# Altium PCB PCB1.PcbDoc (part 1 of 2)
Units mil, origin at the board's own origin, x right, y up, seen from the top; angles counter-clockwise.
Board outline 4330 x 2220 mil, 2 copper layers (Top Layer, Bottom Layer); 72 components, 51 nets, 254 pads, 65 vias.
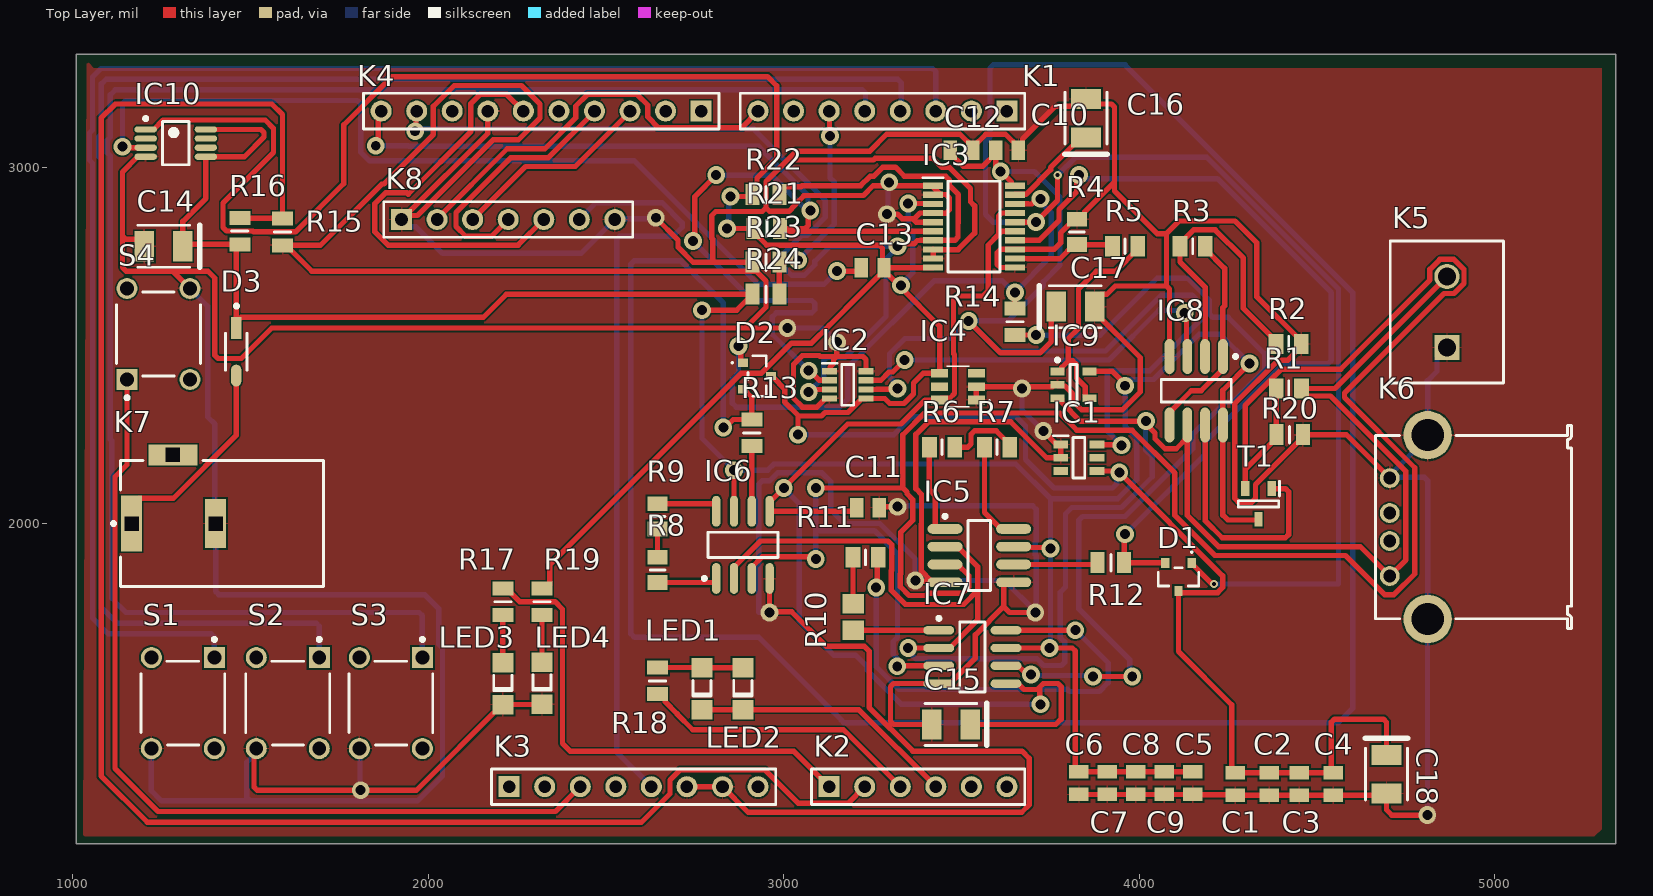
[diagram p0: Top Layer view]
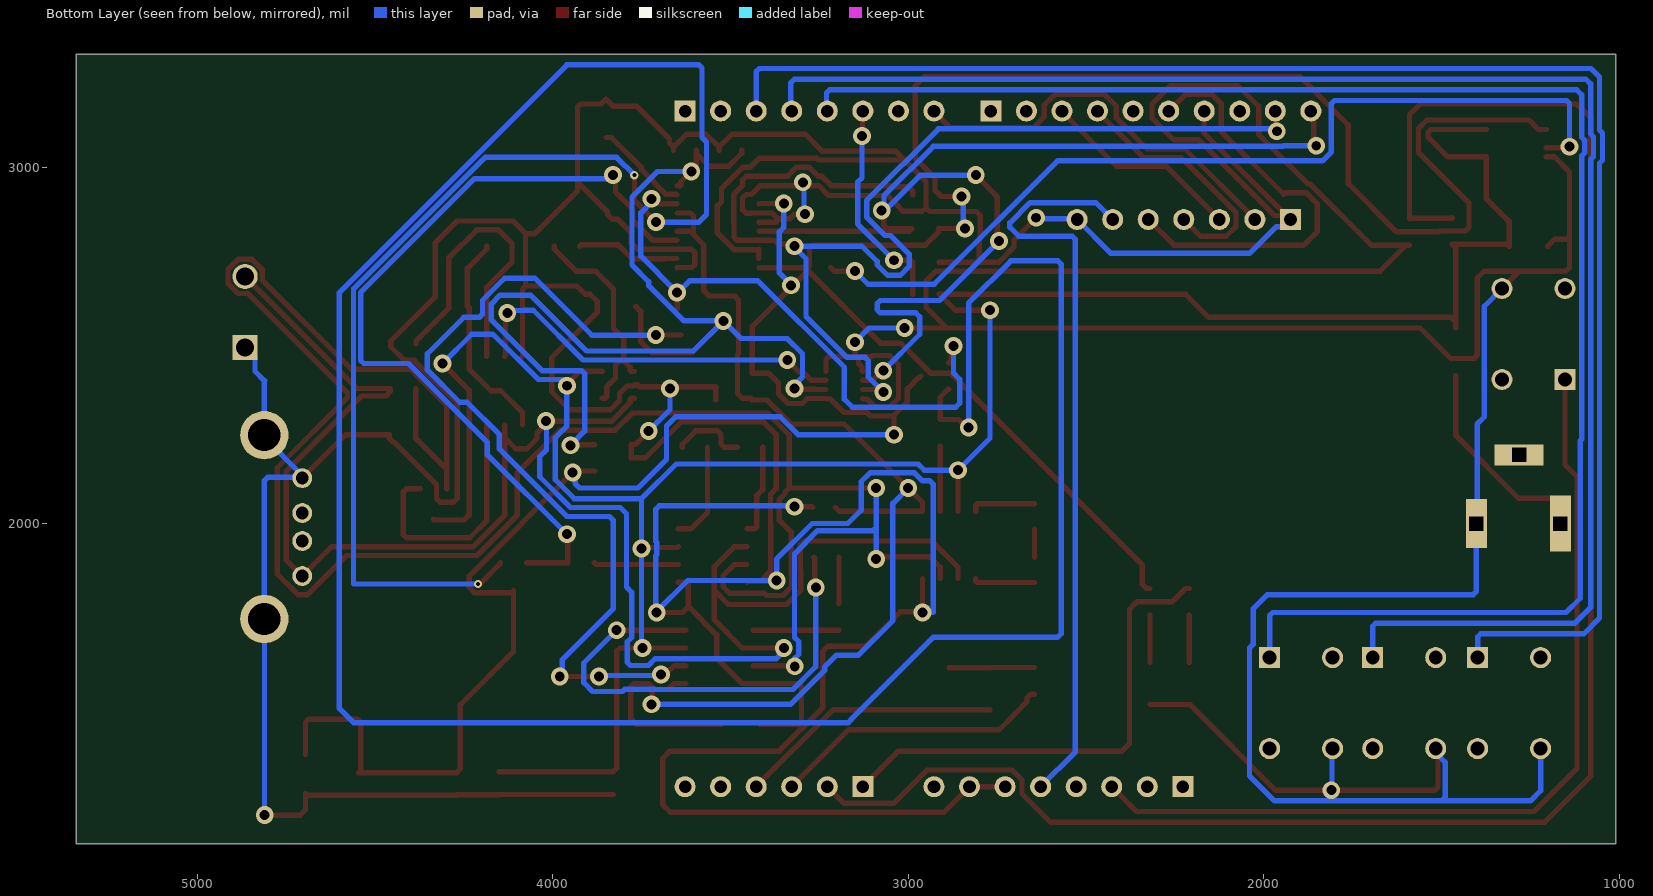
[diagram p1: Bottom Layer view, seen from below]
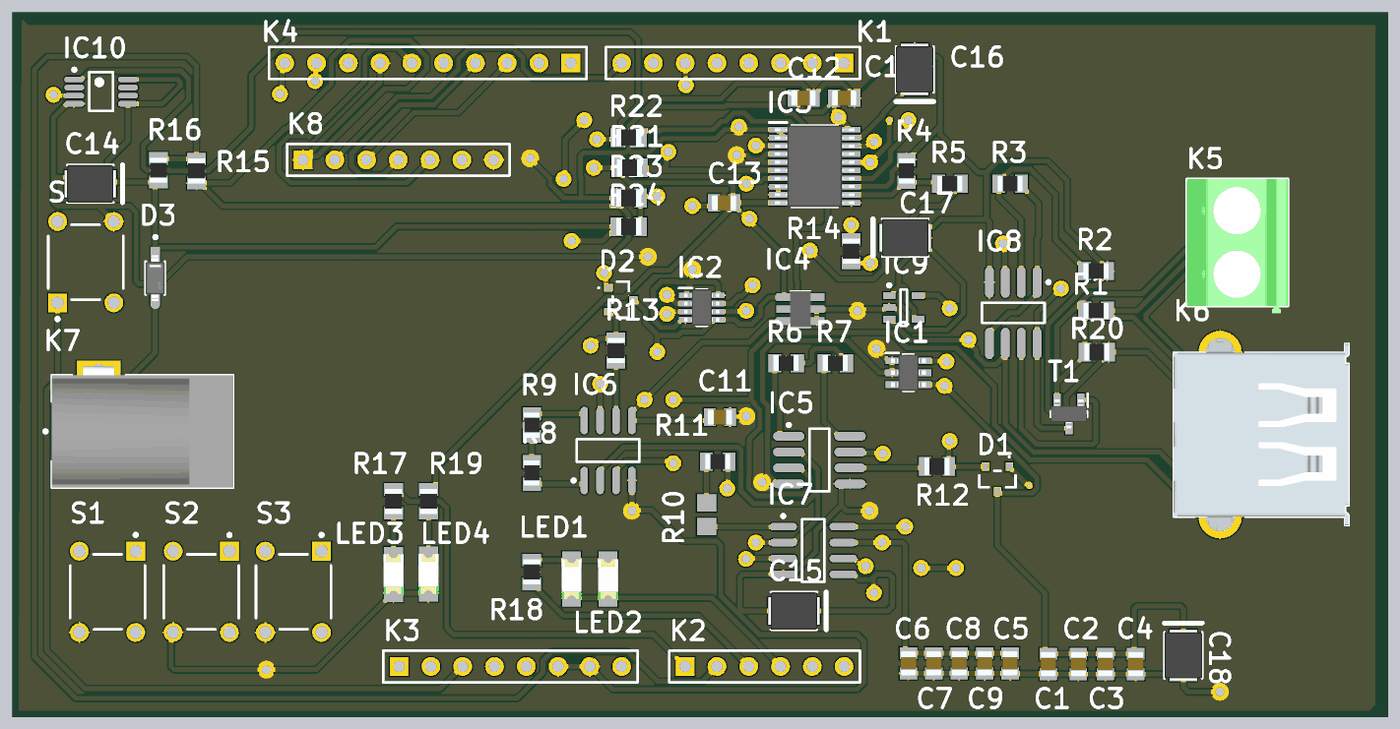
[diagram p2: 3D render of the assembled board from above, using the file's embedded part models]

## Layer stack, top to bottom
Top Solder: solder mask 0.4, Solder Resist, Dk 3.5
Top Layer: signal copper 1.4
Dielectric 1: dielectric 12.6, FR-4, Dk 4.8
Bottom Layer: signal copper 1.4
Bottom Solder: solder mask 0.4, Solder Resist, Dk 3.5

## Board outline
1010,1100 1010,3320 5340,3320 5340,1100

## Design rules (kind name [scope] priority, off if disabled: settings)
BoardOutlineClearance [All] p1: gap=7.87 ignorepadtopadclearanceinfootprint=FALSE
Clearance [All] p1: gap=5 ignorepadtopadclearanceinfootprint=FALSE except(9.84: Arc-Hole Track-Hole SMDPad-Hole THPad-Hole Via-Hole Fill-Hole Poly-Hole Region-Hole Text-Hole)
ComponentClearance [All] p1: gap=5 collisioncheckmode=3 verticalgap=5 showdistances=TRUE
DiffPairsRouting [All] p1: maxlimit=10 minlimit=5 mostfreqgap=5 toplayer_minwidth=5 toplayer_maxwidth=1000 toplayer_prefwidth=5 bottomlayer_minwidth=5 bottomlayer_maxwidth=1000 bottomlayer_prefwidth=5 maxuncoupledlength=500
Height [All] p1: minheight=0 maxheight=71497.94 prefheight=500
HoleSize [All] p1: absolutevalues=TRUE maxlimit=248.03 minlimit=11.81 maxpercent=80.000 minpercent=20.000
HoleToHoleClearance [All] p1: gap=9.84 allowstackedmicrovias=FALSE
MinimumAnnularRing [All] p1: minimumring=3
MinimumSolderMaskSliver [All] p1: minsoldermaskwidth=0
PlaneClearance [All] p1: clearance=5
PlaneConnect PlaneConnectPowerPads [InPadClass('PowerPads')] p1: planeconnectstyle=Direct reliefexpansion=20 reliefentries=4 reliefconductorwidth=10 reliefairgap=10
PlaneConnect [All] p2: pad.planeconnectstyle=Relief pad.reliefexpansion=11.81 pad.reliefentries=4 pad.reliefconductorwidth=5 pad.reliefairgap=5 via.planeconnectstyle=Direct via.reliefexpansion=11.81 via.reliefentries=4 via.reliefconductorwidth=5 via.reliefairgap=5
PolygonConnect PolygonConnectPowerPads [All vs (InPadClass('PowerPads'))] p1: connectstyle=Direct reliefconductorwidth=10 reliefentries=4 polygonreliefangle="90 Angle" airgapwidth=10
PolygonConnect [All] p2: thpad.connectstyle=Relief thpad.reliefconductorwidth=5 thpad.reliefentries=4 thpad.polygonreliefangle="90 Angle" thpad.airgapwidth=5 smdpad.connectstyle=Relief smdpad.reliefconductorwidth=5 smdpad.reliefentries=4 smdpad.polygonreliefangle="90 Angle" smdpad.airgapwidth=5 via.connectstyle=Direct via.reliefconductorwidth=5 via.reliefentries=4 via.polygonreliefangle="90 Angle" via.airgapwidth=5
RoutingVias [All] p1: holewidth=11.81 width=23.62 viastyle="Through Hole" minholewidth=11.81 minwidth=23.62 maxholewidth=23.62 maxwidth=259.84
SilkToSilkClearance [All] p1: silktosilkclearance=0
SilkToSolderMaskClearance [IsPad] p1: minsilkscreentomaskgap=5 clearancetoexposedcopper=TRUE
SolderMaskExpansion [All] p1: expansion=2.95 istentingtop=FALSE
Width [All] p1: maxlimit=1000 minlimit=5 preferedwidth=15 minimp=50.000000 maximp=50.000000 favimp=50.000000
20 further rules are at their usual default settings.

## Classes and differential pairs
component class SchemaMicro: C1 C2 C3 C4 C5 C6 C7 C8 C9 C10 C11 C13 C14 C15 C17 C18 D3 IC1 IC4 IC10 K7 LED4 R19
component class Schemamicro2: C12 C16 D1 D2 IC2 IC3 IC5 IC6 IC7 IC8 IC9 K1 K2 K3 K4 K6 K8 LED1 LED2 LED3 R1 R2 R3 R4 R5 R6 R7 R8 R9 R10 R11 R12 R13 R14 R15 R16 R17 R18 R20 R21 R22 R23 R24 S1 S2 S3 S4 T1

## Components (designator, comment, footprint, x,y, rotation, side; value= is the part's Value field where it differs from the comment)
C1 "100n" CAPC2012X90N 4270,1267.68 r270 top
C2 "100n" CAPC2012X90N 4365,1267.68 r270 top
C3 "100n" CAPC2012X90N 4450,1267.68 r270 top
C4 "100n" CAPC2012X90N 4545,1267.68 r270 top
C5 "100n" CAPC2012X90N 4150,1270 r270 top
C6 "100n" CAPC2012X90N 3830,1270 r270 top
C7 "100n" CAPC2012X90N 3910,1270 r270 top
C8 "100n" CAPC2012X90N 3990,1270 r270 top
C9 "100n" CAPC2012X90N 4070,1270 r270 top
C10 "100n" CAPC2012X90N 3628.11,3050 r0 top
C11 "100n" CAPC2012X90N 3236.89,2045 r0 top
C12 "100n" CAPC2012X90N 3500,3050 r180 top
C13 "10n" CAPC2012X90N 3250,2720 r180 top
C14 "10µ, 16v" KEMT-T491-B_L 1255.87,2780 r180 top
C15 "10µ, 16v" KEMT-T491-B_L 3470,1435 r180 top
C16 "" KEMT-T491-B_L 3850,3140 r90 top
C17 "10µ, 16v" KEMT-T491-B_L 3820,2610 r0 top
C18 "10µ, 16v" KEMT-T491-B_L 4695,1295 r270 top
D1 "" NXP-SOT23-3_V 4110,1850 r0 top
D2 "" NXP-SOT23-3_V 2925,2415 r90 top
D3 "" FP-SOD123-IPC_A 1460,2483.06 r270 top
IC1 "" SOT95P280X100-6N 3830,2185 r0 top
IC2 "" SOT65P280X100-8N 3180,2390 r0 top
IC3 "" SOP65P640X110-20N 3535,2835 r0 top
IC4 "" LT1790BCS6125TRMPBF 3490,2385 r90 top
IC5 "" LT-S8-8_M 3550,1910 r0 top
IC6 "" LT-S8-8_N 2885,1940 r90 top
IC7 "" LT-S8-8_N 3530.51,1625 r0 top
IC8 "" LT-S8-8_M 4160,2373.54 r270 top
IC9 "" LT-S5-5-TSOT-23_L 3815,2390 r0 top
IC10 "" LT-MS8_N 1290,3070 r0 top
K1 "Header 8" HDR1X8 3627.6,3160 r180 top
K2 "Header 6" HDR1X6 3127.6,1260 r0 top
K3 "Header 8" HDR1X8 2227.6,1260 r0 top
K4 "Header 10" HDR1X10 2767.6,3160 r180 top
K5 "" PHOE-1729128-2_V 4865,2595 r90 top
K6 "" 61400416021 4940,1990 r90 top
K7 "" LUMB-NEB21R_V 1420,2000 r90 top
K8 "OLED-LCD1" HDR1X7 1925,2855 r0 top
LED1 "RED" 1206_A 2770,1535 r90 top
LED2 "Green" 1206_A 2885,1535 r90 top
LED3 "ORANGE" 1206_A 2210,1550 r90 top
LED4 "BLUE" 1206_A 2320,1550.94 r90 top
R1 "100" RESC2012X65N 4420.43,2380 r180 top
R2 "10K" RESC2012X65N 4420,2505 r0 top
R3 "10K" RESC2012X65N 4150,2780 r0 top
R4 "10K" RESC2012X65N 3824.57,2820 r90 top
R5 "10K" RESC2012X65N 3960,2780 r180 top
R6 "NC" RESC2012X65N 3445,2215 r0 top
R7 "NC" RESC2012X65N 3600,2215 r0 top
R8 "NC" RESC2012X65N 2645,1869.57 r90 top
R9 "NC" RESC2012X65N 2645,2020 r270 top
R10 "22K" RESC2013X60X40ML20T25 3195,1737.6 r90 top
R11 "220" RESC2012X65N 3230,1905 r180 top
R12 "100" RESC2014X65N 3920,1890 r180 top
R13 "100" RESC2014X65N 2910,2255 r270 top
R14 "100" RESC2014X65N 3650,2567.6 r270 top
R15 "3K" RESC2014X65N 1590,2820 r270 top
R16 "12K" RESC2014X65N 1470,2822.6 r90 top
R17 "1K" RESC2014X65N 2210,1780 r270 top
R18 "1K" RESC2014X65N 2645,1557.6 r90 top
R19 "1K" RESC2014X65N 2320,1780 r270 top
R20 "10K" RESC2014X65N 4422.6,2250 r0 top
R21 "10K" RESC2014X65N 2952.4,2830 r0 top
R22 "10K" RESC2014X65N 2950,2925 r0 top
R23 "" RESC2014X65N 2950,2735 r0 top
R24 "" RESC2014X65N 2950,2645 r180 top
S1 "" TECO-1825910-6_V 1310,1495 r270 top
S2 "" TECO-1825910-6_V 1605,1495 r270 top
S3 "" TECO-1825910-6_V 1895,1495 r270 top
S4 "" TECO-1825910-6_V 1241.42,2532.95 r90 top
T1 "" SOT95P230X110-3N 4335,2055 r270 top

## Footprints (in the part's own frame and the unit in brackets; to place one, negate y for a bottom-side part, rotate by r counter-clockwise, add the part's x,y. Pads: shape width x height; smd on the part's side, far side on the other; paste and mask are expansions set on the pad)
1206_A [mm] "Chip LED, 2-Leads, Body 3.2x1.6mm, IPC Medium Density"
  rect 1.4x1.5 smd: 1(-1.5,0) 2(1.5,0)
  silkscreen extent -0.5,-0.66 0.6,0.65, body extent -1.6,-0.8 1.6,0.8, height 0.68
61400416021 [mm] "USB 2.0 Type A Horizontal"
  round 1.42 hole 0.92: 1(-3.5,5.99) 2(-1,5.99) 3(1,5.99) 4(3.5,5.99)
  round 3.45 hole 2.3: Shell(-6.57,3.28) Shell(6.57,3.28)
  silkscreen extent -7.25,-7 7.25,7, body extent -8,-7 8,7, height 7.63
CAPC2012X90N [mm]
  rect 0.96x1.39 smd: 1(-0.81,0) 2(0.81,0)
  body extent -1,-0.63 1,0.63, height 0.9
FP-SOD123-IPC_A [mil]
  rect 61.32x29.23 smd paste+0 mask+0: 1(-66.94,0)
  rrect100% 61.32x29.23 smd paste+0 mask+0: 2(66.94,0)
  silkscreen extent -134,-31 52,31, body extent -117,-50 117,50, height 10
HDR1X6 [mm] "Connector; Header; 6 Position"
  rect 1.5x1.5 hole 0.9: 1(0,0)
  round 1.5 hole 0.9: 2(2.54,0) 3(5.08,0) 4(7.62,0) 5(10.16,0) 6(12.7,0)
  silkscreen extent -1.27,-1.27 13.97,1.27
HDR1X7 [mm] "Connector; Header; 7 Position"
  rect 1.5x1.5 hole 0.9: 1(0,0)
  round 1.5 hole 0.9: 2(2.54,0) 3(5.08,0) 4(7.62,0) 5(10.16,0) 6(12.7,0) 7(15.24,0)
  silkscreen extent -1.27,-1.27 16.51,1.27
HDR1X8 [mm] "Connector; Header; 8 Position"
  rect 1.5x1.5 hole 0.9: 1(0,0)
  round 1.5 hole 0.9: 2(2.54,0) 3(5.08,0) 4(7.62,0) 5(10.16,0) 6(12.7,0) 7(15.24,0) 8(17.78,0)
  silkscreen extent -1.27,-1.27 19.05,1.27
HDR1X10 [mm] "Connector; Header; 10 Position"
  rect 1.5x1.5 hole 0.9: 1(0,0)
  round 1.5 hole 0.9: 2(2.54,0) 3(5.08,0) 4(7.62,0) 5(10.16,0) 6(12.7,0) 7(15.24,0) 8(17.78,0) 9(20.32,0) 10(22.86,0)
  silkscreen extent -1.27,-1.27 24.13,1.27
KEMT-T491-B_L [mm] "Molded Capacitor, 2-Leads, Body 3.70x3.00mm, IPC High Density"
  rect 1.4x2.15 smd: 1(-1.375,0) 2(1.375,0)
  silkscreen extent -2.57,-1.5 1.85,1.5, body extent -2.07,-1.5 2.07,1.5, height 2.1
LT1790BCS6125TRMPBF [mm]
  rect 0.62x1.22 smd: 1(-0.95,-1.31) 2(0,-1.31) 3(0.95,-1.31) 4(0.95,1.31) 5(0,1.31) 6(-0.95,1.31)
  silkscreen extent -1.45,-2.3 1.45,0.81, body extent -1.45,-0.81 1.45,0.81, height 1.1
LT-MS8_N [mm] "SOP, 8-Leads, Body 3x3mm, Pitch 0.65mm, IPC Medium Density"
  oval 1.6x0.45 smd: 1(-2.15,0.975) 2(-2.15,0.325) 3(-2.15,-0.325) 4(-2.15,-0.975) 5(2.15,-0.975) 6(2.15,-0.325) 7(2.15,0.325) 8(2.15,0.975)
  silkscreen extent -2.27,-1.55 0.95,1.87, body extent -1.55,-1.55 1.55,1.55, height 1.1
LT-S5-5-TSOT-23_L [mm] "SOT23, 5-Leads, Body 2.90x1.63mm, Pitch 0.95mm, IPC High Density"
  rect 1x0.55 smd: 1(-1.15,0.95) 2(-1.15,0) 3(-1.15,-0.95) 4(1.15,-0.95) 5(1.15,0.95)
  silkscreen extent -1.27,-1.45 0.25,1.9, body extent -0.87,-1.45 0.87,1.45, height 1
LT-S8-8_M [mm] "SOIC, 8-Leads, Body 4.9x3.9mm, Pitch 1.27mm, IPC Low Density"
  oval 2.5x0.7 smd: 1(-2.45,1.905) 2(-2.45,0.635) 3(-2.45,-0.635) 4(-2.45,-1.905) 5(2.45,-1.905) 6(2.45,-0.635) 7(2.45,0.635) 8(2.45,1.905)
  silkscreen extent -2.57,-2.5 0.8,2.93, body extent -2,-2.5 2,2.5, height 1.76
LT-S8-8_N [mm] "SOIC, 8-Leads, Body 4.9x3.9mm, Pitch 1.27mm, IPC Medium Density"
  oval 2.2x0.6 smd: 1(-2.4,1.905) 2(-2.4,0.635) 3(-2.4,-0.635) 4(-2.4,-1.905) 5(2.4,-1.905) 6(2.4,-0.635) 7(2.4,0.635) 8(2.4,1.905)
  silkscreen extent -2.52,-2.5 0.9,2.88, body extent -2,-2.5 2,2.5, height 1.76
LUMB-NEB21R_V [mm] "THD, 3-Leads, Body 14.5x9mm"
  rect 4x1.5 hole 1 square: 1(0,6.45)
  rect 1.5x3.5 hole 1 square: 2(4.9,3.5)
  rect 3.5x1.5 hole 1 square: 3(0,0.45)
  silkscreen extent -4.5,-7.25 4.5,7.87, body extent -4.5,-7.25 5.2,7.25, height 11
NXP-SOT23-3_V [mm] "SOT23, 3-Leads, Body 1.3x2.9mm, Pitch 0.95mm"
  rect 0.6x0.7 smd paste-0.05: 1(0.95,1) 2(-0.95,1) 3(0,-1)
  silkscreen extent -1.45,-0.65 1.45,1.79, body extent -1.45,-0.65 1.45,0.65, height 1.1
PHOE-1729128-2_V [mm] "Receptacle, 2-Leads, Body 8.1x10.16mm, Pitch 5.08mm"
  rect 1.8x1.8 hole 1.3: 1(-2.54,0)
  round 1.8 hole 1.3: 2(2.54,0)
  silkscreen extent -5.08,-4.05 5.08,4.05, body extent -5.65,-4.05 5.08,4.05, height 10.01
RESC2012X65N [mm]
  rect 1.05x1.45 smd: 1(-0.9,0) 2(0.9,0)
  silkscreen extent 0,-0.53 0,0.53, body extent -1,-0.63 1,0.63, height 0.65
RESC2013X60X40ML20T25 [mm] "Chip Resistor, 2-Leads, Body 2.00x1.25mm, IPC Low Density"
  rect 1.4x1.55 smd: 1(-0.95,0) 2(0.95,0)
  body extent -1.1,-0.72 1.1,0.72, height 0.6
RESC2014X65N [mm]
  rect 1x1.5 smd: 1(-0.95,0) 2(0.95,0)
  silkscreen extent 0,-0.59 0,0.59, body extent -1,-0.69 1,0.69, height 0.65
SOP65P640X110-20N [mm]
  rect 1.45x0.45 smd: 1(-2.925,2.925) 2(-2.925,2.275) 3(-2.925,1.625) 4(-2.925,0.975) 5(-2.925,0.325) 6(-2.925,-0.325) 7(-2.925,-0.975) 8(-2.925,-1.625) 9(-2.925,-2.275) 10(-2.925,-2.925) 11(2.925,-2.925) 12(2.925,-2.275) 13(2.925,-1.625) 14(2.925,-0.975) 15(2.925,-0.325) 16(2.925,0.325) 17(2.925,0.975) 18(2.925,1.625) 19(2.925,2.275) 20(2.925,2.925)
  silkscreen extent -3.65,-3.25 1.85,3.5, body extent -3.2,-3.25 3.2,3.25, height 1.1
SOT65P280X100-8N [mm]
  rect 1.05x0.45 smd: 1(-1.3,0.975) 2(-1.3,0.325) 3(-1.3,-0.325) 4(-1.3,-0.975) 5(1.3,-0.975) 6(1.3,-0.325) 7(1.3,0.325) 8(1.3,0.975)
  silkscreen extent -1.83,-1.45 0.42,1.55, body extent -1.4,-1.45 1.4,1.45, height 1
SOT95P230X110-3N [mm]
  rect 1.05x0.6 smd: 1(-1.1,0.95) 2(-1.1,-0.95) 3(1.1,0)
  silkscreen extent -1.62,-1.45 0.22,1.5, body extent -1.15,-1.45 1.15,1.45, height 1.1
SOT95P280X100-6N [mm]
  rect 1.05x0.55 smd: 1(-1.3,0.95) 2(-1.3,0) 3(-1.3,-0.95) 4(1.3,-0.95) 5(1.3,0) 6(1.3,0.95)
  silkscreen extent -1.82,-1.45 0.42,1.58, body extent -1.4,-1.45 1.4,1.45, height 1
TECO-1825910-6_V [mm] "Switch, 4-Leads, Body 5.99x5.99mm"
  rect 1.5x1.5 hole 0.99: 1(-3.25,2.25)
  round 1.5 hole 0.99: 2(3.25,2.25) 3(-3.25,-2.25) 4(3.25,-2.25)
  silkscreen extent -4.67,-3 3,3, body extent -3,-2.99 2.99,3, height 5

## Part data
C1 C2 C3 C4 C5 C6 C7 C8 C9 C10 C11 C12: library part MC0805B104K500CT, "Capacitor", Manufacturer_Name=MULTICOMP, Datasheet Link=https://componentsearchengine.com/Datasheets/2/MC0805B104K500CT.pdf, Height=0.9mm, Manufacturer_Part_Number=MC0805B104K500CT
C13: library part MC0805N102J500CT, "Capacitor", Manufacturer_Name=MULTICOMP, Datasheet Link=http://www.farnell.com/datasheets/1901289.pdf, Height=0.9mm, Manufacturer_Part_Number=MC0805N102J500CT
C14 C15 C16 C17 C18: library part CMP-2000-07192-1, "Tantalum Surface Mount Capacitor, 10 uF, +/- 20%, 16 V, -55 to 125 degC, 2-Pin SMD, RoHS, Tape and Reel", Capacitance=10000000pF, Case Code=B, Case Style=Molded, Manufacturer=Kemet, Operating Temp Range=-55Cto125C, Package / Case=3528-21, Package Description="2-Pin Surface Mount Device, Body 3.5 x 2.8 mm", Package Reference=T491-B, Tolerance (+ or -)=20%, Voltage=16VDC, Construction=SMTChip, Datasheet URL=http://www.kemet.com/Lists/ProductCatalog/Attachments/254/KEM_T2005_T491.pdf, Datasheet Version=06/2016, DCL=1.6uA, DF=6%, ESR=2.8ohm, Failure Rate=NotRequired, Insulation=NotRequired, Lead Spacing (nom)=NotRequiredmm, Length W/Weld=NotRequiredmm, Length W/Weld (max)=NotRequiredmm, Manufacturer URL=http://www.kemet.com/, Mounting Style=SurfaceMount, Mounting Technology=SurfaceMount, Packaging=TapeandReel, Polarity=Polar, Product Depth (mm)=2.8mm, Product Diameter (mm)=NotRequiredmm, Product Height (mm)=1.9mm, Product Length (mm)=3.5mm, Rad Hardened=No, Seal=NotRequired, Seated Plane Height=NotRequiredmm, Wire Form=NotRequired
D1 D2: library part CMP-0417-00003-1, "Schottky Barrier Diode, 30 V, 2 uA, -55 to 150 degC, 3-Pin SOT23, RoHS, Tape and Reel", Manufacturer="NXP Semiconductors", PartNumber=BAT54C, Temperature Range="-55 to 150 degC", Cd (pF)=10, ComponentLink1Description="Manufacturer URL", ComponentLink1URL=http://www.nxp.com/, ComponentLink2Description=Datasheet, ComponentLink2URL=http://www.nxp.com/documents/data_sheet/BAT54_SER.pdf, DatasheetVersion="Rev. 5", IR (uA)=2, Mounting Technology="Surface Mount", PackageDescription="3-Pin Plastic Surface-mounted Package, Body 1.3 x 2.9 mm, Pitch 0.95 mm", PackageReference=SOT23-3, Packing="Tape and Reel", RoHS=TRUE, Rth(j-a) (K/W)=500, Trr (ns)=5, VF (mV)=800, VR (V)=30
D3: library part CMP-0303-00003-3, "DIODE SCHOTTKY 40V 1A SOD123", Average Rectified Current=1A, Capacitance=110pF, Case/Package=SOD-123-2, Forward Voltage=450mV, Max Forward Surge Current (Ifsm)=25A, Max Operating Temperature=125°C, Max Power Dissipation=450mW, Max Repetitive Reverse Voltage (Vrrm)=40V, Min Operating Temperature=-65°C, Package Quantity=3000, Peak Reverse Current=50uA, Contact Plating=Tin, Current Rating=1A, Element Configuration=Single, Forward Current=1A, Height=1.25mm, Lead Free="Lead Free", Length=2.85mm, Max Reverse Voltage (DC)=40V, Number of Pins=2, Output Current=1A, Packaging="Tape and Reel", Peak Non-Repetitive Surge Current=25A, Polarity=Standard, Radiation Hardening=No, REACH SVHC="No SVHC", Termination=SMD/SMT, Voltage Rating (DC)=40V, Weight=0.000353oz, Width=1.7mm
IC1: library part LT1790ACS6-2.048, "Integrated Circuit", Manufacturer_Name="Linear Technology", Datasheet Link=http://docs-emea.rs-online.com/webdocs/05ab/0900766b805ab5c8.pdf, Height=1mm, Manufacturer_Part_Number=LT1790ACS6-2.048
IC2: library part LTC2631CTS8-LZ12#TRMPBF, "Integrated Circuit", Manufacturer_Name="Analog Devices", Mouser Part Number=584-2631CTS8LZ12TMPF, Arrow Part Number=LTC2631CTS8-LZ12#TRMPBF, Arrow Price/Stock=https://www.arrow.com/en/products/ltc2631cts8-lz12trmpbf/analog-devices, Datasheet Link=https://www.analog.com/media/en/technical-documentation/data-sheets/2631fd.pdf, Height=1mm, Manufacturer_Part_Number=LTC2631CTS8-LZ12#TRMPBF, Mouser Price/Stock=https://www.mouser.co.uk/ProductDetail/Analog-Devices/LTC2631CTS8-LZ12TRMPBF/?qs=hVkxg5c3xu%252BAZArayp8N8g%3D%3D
IC3: library part LTC2309CF#PBF, "Integrated Circuit", Manufacturer_Name="Linear Technology", Mouser Part Number=584-LTC2309CF#PBF, Arrow Part Number=LTC2309CF#PBF, Arrow Price/Stock=https://www.arrow.com/en/products/ltc2309cfpbf/linear-technology, Datasheet Link=http://docs-emea.rs-online.com/webdocs/10c2/0900766b810c2cad.pdf, Height=1.1mm, Manufacturer_Part_Number=LTC2309CF#PBF, Mouser Price/Stock=https://www.mouser.com/Search/Refine.aspx?Keyword=584-LTC2309CF%23PBF
IC4: library part LT1790BCS6-1.25#TRMPBF, "Integrated Circuit", Manufacturer_Name="Analog Devices", Mouser Part Number=584-1790BCS61.25TMPF, Arrow Part Number=LT1790BCS6-1.25#TRMPBF, Arrow Price/Stock=https://www.arrow.com/en/products/lt1790bcs6-1.25trmpbf/analog-devices, Datasheet Link=https://www.arrow.com/en/products/lt1790bcs6-1.25trmpbf/analog-devices, Height=1mm, Manufacturer_Part_Number=LT1790BCS6-1.25#TRMPBF, Mouser Price/Stock=https://www.mouser.co.uk/ProductDetail/Analog-Devices/LT1790BCS6-125TRMPBF/?qs=ytflclh7QUXpPD13KZ8jjg%3D%3D
IC5: library part CMP-0359-03660-2, "Single Channel, Micropower, Single Supply Rail-to-Rail Output Instrumentation Amplifiers, 0.06 MHz Typical GBW, 0.026 V/us Typical SR, 2.2 to 36 V, 8-Pin SOIC (S8-8), Commercial, Pb-Free", Linear Technology Part Number=LT1789-1, Manufacturer="Linear Technology", PartNumber=LT1789CS8-1#PBF, Channels (#)=1, ComponentLink1Description="Manufacturer URL", ComponentLink1URL=http://www.linear.com/, ComponentLink2Description=Datasheet, ComponentLink2URL=http://cds.linear.com/docs/en/datasheet/1789fc.pdf, ComponentLink3Description="Package Specification", ComponentLink3URL=http://cds.linear.com/docs/en/packaging/05081610_G_SO8.pdf, DatasheetVersion="Rev. C", GBW (MHz) Typical=0.06, Is (mA) Typical=0.067, Mounting Technology="Surface Mount", PackageDescription="8-Pin Plastic Small Outline, Body 4.9 x 3.9 mm, Pitch 1.27 mm", PackageReference=LT-S8-8, PackageVersion="Rev G", RevisionNote="URLs updated", RoHS=Pb-Free, SR (V/us) Typical=0.026, Type=IA, Vos (mV) Guaranteed=0.75, Vos (mV) Typical=0.15, Vs Max (V)=36, Vs Min (V)=2.2
IC6 IC7: library part CMP-0359-03644-3, "Single Channel, Micropower, Single Supply Rail-to-Rail Output Instrumentation Amplifiers, 0.06 MHz Typical GBW, 0.026 V/us Typical SR, 2.2 to 36 V, 8-Pin SOIC (S8-8), Commercial, Pb-Free", Linear Technology Part Number=LT1789-10, Manufacturer="Linear Technology", PartNumber=LT1789CS8-10#PBF, Channels (#)=1, ComponentLink1Description="Manufacturer URL", ComponentLink1URL=http://www.linear.com/, ComponentLink2Description=Datasheet, ComponentLink2URL=http://cds.linear.com/docs/en/datasheet/1789fc.pdf, ComponentLink3Description="Package Specification", ComponentLink3URL=http://cds.linear.com/docs/en/packaging/05081610_G_SO8.pdf, DatasheetVersion="Rev. C", GBW (MHz) Typical=0.06, Is (mA) Typical=0.067, Mounting Technology="Surface Mount", PackageDescription="8-Pin Plastic Small Outline, Body 4.9 x 3.9 mm, Pitch 1.27 mm", PackageReference=LT-S8-8, PackageVersion="Rev G", RevisionNote="URLs updated", RoHS=Pb-Free, SR (V/us) Typical=0.026, Type=IA, Vos (mV) Guaranteed=3, Vos (mV) Typical=0.65, Vs Max (V)=36, Vs Min (V)=2.2
IC8: library part CMP-0359-02698-2, "Dual Channel, Low Noise, CMOS Operational Amplifier, RRO, 18 MHz Typical GBW, 10 V/us Typical SR, 2.8 to 12 V, 8-Pin SOIC (S8-8), Commercial, Pb-Free", Linear Technology Part Number=LTC6241HV, Manufacturer="Linear Technology", PartNumber=LTC6241HVCS8#PBF, Channels (#)=2, ComponentLink1Description="Manufacturer URL", ComponentLink1URL=http://www.linear.com/, ComponentLink2Description=Datasheet, ComponentLink2URL=http://cds.linear.com/docs/en/datasheet/624012fe.pdf, ComponentLink3Description="Package Specification", ComponentLink3URL=http://cds.linear.com/docs/en/packaging/05081610_G_SO8.pdf, DatasheetVersion="Rev. E", GBW (MHz) Typical=18, Is (mA) Typical=1.8, Mounting Technology="Surface Mount", PackageDescription="8-Pin Plastic Small Outline, Body 4.9 x 3.9 mm, Pitch 1.27 mm", PackageReference=LT-S8-8, PackageVersion="Rev G", RevisionNote="URLs updated", RoHS=Pb-Free, SR (V/us) Typical=10, Type=VFB, Vos (mV) Typical=0.04, Vs Max (V)=12, Vs Min (V)=2.8
IC9: library part CMP-0359-02161-2, "Single Channel, Micropower Zero-Drift Operational Amplifier, 0.5 MHz Typical GBW, 0.5 V/us Typical SR, 2.7 to 11 V, 5-Pin SOT23 (S5-5), Commercial, Pb-Free, Mini Reel", Linear Technology Part Number=LTC2054HV, Manufacturer="Linear Technology", PartNumber=LTC2054HVCS5#TRMPBF, Channels (#)=1, Code_JEDEC=MO-193, ComponentLink1Description="Manufacturer URL", ComponentLink1URL=http://www.linear.com/, ComponentLink2Description=Datasheet, ComponentLink2URL=http://cds.linear.com/docs/en/datasheet/20545fc.pdf, ComponentLink3Description="Package Specification", ComponentLink3URL=http://cds.linear.com/docs/en/packaging/SOT_5_05-08-1635.pdf, DatasheetVersion="Rev. C", GBW (MHz) Typical=0.5, Is (mA) Typical=0.15, Mounting Technology="Surface Mount", PackageDescription="5-Lead Plastic TSOT-23, Body 1.63 x 2.90 mm, Pitch 0.95 mm", PackageReference=LT-S5-5-TSOT-23, Packing="Mini Reel", RevisionNote="URLs updated", RoHS=Pb-Free, SR (V/us) Typical=0.5, Type=ZD, Vos (mV) Typical=0.0005, Vs Max (V)=11, Vs Min (V)=2.7
IC10: library part CMP-0476-00707-1, "150 mA, Low Noise, LDO Micropower Regulator, 1.8 to 20 V Vin, 5 V Vout, 8-pin SOP (MS8-8), -40 to 125 degC, Pb-Free", Dropout Voltage(V)=0.27, Manufacturer="Linear Technology", Output Voltage="5 V", PartNumber=LT1762EMS8-5#PBF, Shutdown Current(uA)=1, ComponentLink1Description="Manufacturer URL", ComponentLink1URL=http://www.linear.com/, ComponentLink2Description=Datasheet, ComponentLink2URL=http://cds.linear.com/docs/en/datasheet/1762fa.pdf, ComponentLink3Description="Package Specification", ComponentLink3URL=http://cds.linear.com/docs/en/packaging/05081660_G_MS8.pdf, DatasheetVersion="Rev. A", Discrete Pass Element=no, Iout(mA)=150, Isupply(mA)=0.025, Mounting Technology="Surface Mount", Noise(uV)=20, Number of Outputs=1, PackageDescription="8-Pin Plastic MSOP, Body 3 x 3 mm, Pitch 0.65 mm", PackageReference=MS8, PackageVersion="Rev. G, 05/2013", PSRR(dB)=65, RoHS=TRUE, Vin Max(V)=20, Vin Min(V)=1.8
K1 K3: "Header, 8-Pin", LatestRevisionDate=17-Jul-2002, LatestRevisionNote="Re-released for DXP Platform.", Publisher="Altium Limited"
K2: "Header, 6-Pin", LatestRevisionDate=17-Jul-2002, LatestRevisionNote="Re-released for DXP Platform.", Publisher="Altium Limited"
K4: "Header, 10-Pin", LatestRevisionDate=17-Jul-2002, LatestRevisionNote="Re-released for DXP Platform.", Publisher="Altium Limited"
K5: library part CMP-2000-05815-1, "PCB Terminal Block, 13.5 A, 400 V, 2-Pin THD, RoHS, Bulk", Current Rating=13500mA, Manufacturer="Phoenix Contact", Package Description="2-Pin Through Hole Device, Body 8.1 x 10.16 mm, Pitch 5.08 mm", Package Reference=1729128-2, Package Version=03/2015, PartNumber=1729128, Voltage Rating=400V, Datasheet URL=https://datasheet.ciiva.com/16046/1729128-16046181.pdf, Datasheet Version=12/2013, Manufacturer URL=http://www.phoenixcontact.com/, Mounting Technology=ThroughHole, No. of Positions=2, No. of Rows=1, Orientation=Horizontal, Package URL=https://www.phoenixcontact.com/online/portal/pi/pxc/product_detail_page/!ut/p/b1/3VdJjqNKFDxLH8AFycySyWY2ozFsEPOMMQaDOX1XedGL_1Vdm5YXJleknhSKeBkvI6EA8ncAo3AYoDhBQGco6KN7VURTdemj9us_IEKEZo_YHiPAEWEFmDGOHMORkqKYCORBZxgL7ZoaZYcbFFUZ3fqxSY6GOuxydWUuHqz1ynmMFygu583Bob0Ewr6Sd_l-5m-kAueHiB0jpRwZwe58wwtkpxtMYd_LmGcDRU02dRNEyWt6Y2ti5pSyJ_reIkzIulrqApdnbT11V5jnCKbYNCvhEM1MCpPByat_X379-iThf08CI5GfOPqfBeS3BRoBOdD55AKVv0iLwCMq-2BrzXWSGRH7pUGD9uwXQjiph3xL0DKQwdGa0JImiIOmBNOestqgwTHSSs2oOep-78apyXQBvNi8ZLaFjvjWvcaUEBu0MC6Wbe-d6mB0FAebo2lUWinqYaZs5DAYzV0RP9yitUjnGJ0iI9xhZkT42OCQNUJJhkgWINNQLP2JFP6OpMg3JCVg70jqHT0lvKOnhHf0lPuOnnLf0VPuWx6_dxwUIvwk5WMkT0kLL1mh61l2yZVSzG3pYV_bqo-mj6uMKwKwdnnW8Jh5RTOJzMOA5c-eJDaZQw4mTMPH02PvS_ZAqNVjVTo2WyYLkwH_KU1mmmG5kjRhDqPXLwwVHvVOjCM60-fpXvTDfMGW1PVFVS1r4e4yVDk4ZdNbkUHvqPqQSeian4UD39fNKmachqdJ1NJbyk8rXT9mXTvPk3oE5meulKGgiruPJek-4I9hTT6G8ZLOyRSm2RRVbThERQad5OS28hdt4YW4vG0stgYYzsWsK4_7y6DZMjJSCqri1kyiZR5vD7pwIrNR7QwPHTcLTI5qT7eRlpHrdGiupYlqQDJ7zy_CND8fWWBoLRXxk1RVcXiBQwbTD4Xi7KL-FuO94t9xaqweXzH, Packing=Bulk, Pitch=5.08mm, RoHS=TRUE
K6: library part CMP-1502-03227-1, "USB 2.0 Type A Receptacle WR-COM, Horizontal, THT", Contact Resistance=20mOhm, Manufacturer="Wurth Elektronik", Operating Temperature=-40to105degC, Package Reference=61400416021, Rated Current=1.5A, Working Voltage=30VAC, Connector Type=USB2.0TypeA, Datasheet URL=https://katalog.we-online.de/em/datasheet/61400416021.pdf, Gender=Receptacle, Manufacturer URL=http://www.we-online.de, Mounting Technology=THT, Orientation=Horizontal, Packaging=Tray, Part Number=61400416021, Publisher=WurthElektronik
K7: library part CMP-2000-06841-1, "Jack Socket, Body 14.5 x 9 mm, Height 11 mm, -20 to 70 degC, 3-Pin THD, RoHS, Bulk", Current Rating=3A, Manufacturer=Lumberg, Maximum Operating Temperature=+70°C, Minimum Operating Temperature=-20°C, Package Description="3-Pin Through Hole Device, Body 14.5 x 9 mm, Height 11 mm", Package Reference=NEB21R, Voltage Rating=12Vdc, Body Orientation=RightAngle, Datasheet URL=https://datasheet.ciiva.com/11720/0900766b805694d6-11720273.pdf, Datasheet Version=12/2004, Manufacturer URL=http://www.lumberg.com/, Mounting Technology=ThroughHole, Mounting Type=ThroughHole, Plug/Socket=Socket, Termination Method=Solder
K8: library part "Header 7", "Header, 7-Pin", LatestRevisionDate=17-Jul-2002, LatestRevisionNote="Re-released for DXP Platform.", Publisher="Altium Limited"
LED1: library part CMP-1426-00013-1, "SMD mono-color Chip LED, WL-SMCW, Red", Color=Red, Manufacturer="Wuerth Elektronik", PartNumber=150120RS75000, ComponentLink1Description="Manufacturer URL", ComponentLink1URL=http://www.we-online.com, ComponentLink2Description=Datasheet, ComponentLink2URL=http://katalog.we-online.com/led/datasheet/150120RS75000.pdf, PackageReference=1206_A
LED2: library part CMP-1426-00014-1, "SMD mono-color Chip LED, WL-SMCW, Green", Manufacturer="Wuerth Elektronik", PartNumber=150120GS75000, Color=Green, ComponentLink1Description="Manufacturer URL", ComponentLink1URL=http://www.we-online.com, ComponentLink2Description=Datasheet, ComponentLink2URL=http://katalog.we-online.com/led/datasheet/150120GS75000.pdf, PackageReference=1206_A
LED3: library part CMP-1426-00019-1, "SMD mono-color Chip LED, WL-SMCW, Yellow", Color=Yellow, Manufacturer="Wuerth Elektronik", PartNumber=150120YS75000, ComponentLink1Description="Manufacturer URL", ComponentLink1URL=http://www.we-online.com, ComponentLink2Description=Datasheet, ComponentLink2URL=http://katalog.we-online.com/led/datasheet/150120YS75000.pdf, PackageReference=1206_A
LED4: library part CMP-1426-00015-1, "SMD mono-color Chip LED, WL-SMCW, Blue", Color=Blue, Manufacturer="Wuerth Elektronik", PartNumber=150120BS75000, ComponentLink1Description="Manufacturer URL", ComponentLink1URL=http://www.we-online.com, ComponentLink2Description=Datasheet, ComponentLink2URL=http://katalog.we-online.com/led/datasheet/150120BS75000.pdf, PackageReference=1206_A
R1 R6 R7 R8 R9: library part MCTC0525B1000T5E, "Resistor", Manufacturer_Name=MULTICOMP, Datasheet Link=https://componentsearchengine.com/Datasheets/2/MCTC0525B1001T5E.pdf, Height=0.65mm, Manufacturer_Part_Number=MCTC0525B1000T5E
R2 R3 R4 R5: library part MCTC0525B1002T5E, "Resistor", Manufacturer_Name=MULTICOMP, Datasheet Link=https://componentsearchengine.com/Datasheets/2/MCTC0525B1001T5E.pdf, Height=0.65mm, Manufacturer_Part_Number=MCTC0525B1002T5E
R10: library part CMP-2001-00614-1, Manufacturer=Panasonic, Part Number=ERA6AEB223V
R11: library part MCTC0525B1000T5E, "Resistor 220 ohm", Manufacturer_Name=MULTICOMP, Datasheet Link=https://componentsearchengine.com/Datasheets/2/MCTC0525B1001T5E.pdf, Height=0.65mm, Manufacturer_Part_Number=MCTC0525B1000T5E
R12 R13 R14: library part MC01W08055100R, "Resistor", Manufacturer_Name=MULTICOMP, Datasheet Link=http://www.farnell.com/datasheets/1729047.pdf, Height=0.65mm, Manufacturer_Part_Number=MC01W08055100R
R15 R16: library part MC01W0805512K, "Resistor", Manufacturer_Name=MULTICOMP, Datasheet Link=http://www.farnell.com/datasheets/1729047.pdf, Height=0.65mm, Manufacturer_Part_Number=MC01W0805512K
R17 R18 R19: library part MC01W080551K, "Resistor 1K ohm", Manufacturer_Name=MULTICOMP, Datasheet Link=http://www.farnell.com/datasheets/1729047.pdf, Height=0.65mm, Manufacturer_Part_Number=MC01W080551K
R20 R21 R22 R23 R24: library part MC01W0805510K, "Resistor", Manufacturer_Name=MULTICOMP, Datasheet Link=http://www.farnell.com/datasheets/1729047.pdf, Height=0.65mm, Manufacturer_Part_Number=MC01W0805510K
S1 S2 S3 S4: library part CMP-1684-00021-1, "Tact Switch, SPST-NO, 0.05 A, -35 to 85 degC, 4-Pin THD, RoHS, Bulk", Actuator Color=Black, Contact Rating @ Voltage=0.05A@24VDC, Dielectric Strength=500VAC, Manufacturer="TE Connectivity", Maximum AC Voltage Rating=N/A, Maximum Contact Resistance=100mOhm, Maximum DC Voltage Rating=24V, Minimum Insulation Resistance=100MOhm, Operating Temperature=-35to85C, Package Description="4-Pin Through Hole Device, Body 5.99 x 5.99 mm, Pitch 6.5 mm", Package Reference=THD, Part No=1825910-6, Actuator Length=1.4mm, Actuator Material=PolybutyleneTerephthalate, Actuator Style=RoundButton, Base Material=N/A, Body Orientation=Straight, Bushing Type=Unthreaded, Contact Material=CopperAlloy, Contact Plating=Silver, Datasheet URL=http://www.te.com/commerce/DocumentDelivery/DDEController?Action=showdoc&DocId=Customer+Drawing%7F1825910%7FC9%7Fpdf%7FEnglish%7FENG_CD_1825910_C9.pdf%7F1825910-6, Datasheet Version="Rev. C9", Dimension=5.99x5mm, Electrical Life=100000Cycles, Family=1825910, Function=MomentaryContact, Housing Material=N/A, Illumination=N/R, Manufacturer URL=http://www.te.com, Mechanical Life=100000Cycles, Mounting=ThroughHole, Packaging=N/A, Pole Throw Configuration=SPST, Product Weight=N/A, RoHS=Yes, Seal Description=N/A, Seal Location=N/A, Switch Configuration=OFF(ON), Terminal Type=PCPins, Thread Size=N/R
T1: library part BC847C_AU,215, "Transistor BJT NPN", Manufacturer_Name=Nexperia, Manufacturer_Part_Number=BC847C/AU,215, Datasheet Link=http://assets.nexperia.com/documents/data-sheet/BC847_SER.pdf, Height=1.1mm

## Via types
v1: diameter 50, hole 28, Top Layer to Bottom Layer, 63 vias
v2: diameter 23.62, hole 11.81, Top Layer to Bottom Layer, 2 vias

## Nets (pads, with @x,y where several pads share a name; then routed paths per layer and width w, separated by ;. In a path a pad name is that pad's centre, name@x,y a point inside that pad or via, vN(x,y) a via of type N, cw(c..) or ccw(c..) an arc to the next point about the centre after c; other vN are vias at no path point)
+1V25: C11.1 C15.1 IC3.15 IC3.17 IC4.6 IC6.5 IC7.5 | length 3362.6
  Top Layer w15: C11.1 3194.49,2034.49 IC6.5 2960,2060 v1(3000,2100) 3180,2280 3329.9,2280 3397.49,2347.6 IC4.6 3443.13,2352.3 3466.7,2352.3 3479.94,2365.55 3479.94,2475.35 3477.5,2477.8 3477.5,2628.71 3488.79,2640 3560,2640 3575,2655 3575,2783.61 3604.11,2812.72 ; C15.1 3765,1435 3780,1450 3780,1541.21 3771.21,1550 3730.1,1550 3720,1539.9 ; IC7.5 3658.83,1550 3675.68,1533.15 3713.26,1533.15 3720,1539.9 ; IC3.15 3613.6,2822.2 3604.11,2812.72 ; IC3.17 3612.9,2873.39 3604.11,2864.6 3604.11,2812.72 ; v1(3721.73,1491.51) 3720,1493.23 3720,1539.9
  Bottom Layer w15: v1(3000,2100) 3043.35,2056.65 3043.35,1726.65 3140,1630 3201.21,1630 3235,1596.21 3235,1587.22 3330.72,1491.51 v1(3721.73,1491.51)
+2V5: C10.1 C12.2 C17.1 IC1.6 IC2.6 IC3.20 | length 3274.7
  Top Layer w15: IC2.6 3260.74,2377.2 3261.33,2377.79 3317.79,2377.79 v1(3320,2380) ; C12.2 3468.11,3041.54 3504.51,3005.14 3559.82,3005.14 C10.1@3596.22,3041.54 ; v1(3520,2570) 3610,2480 3720.1,2480 3752.5,2512.4 3752.5,2596.63 C17.1 ; C10.1 C10.1@3596.22,3041.54 ; IC3.20 3641.36,2950.16 3640,2951.52 3640,2960 v1(3610,2990) 3596.22,3003.78 C10.1@3596.22,3041.54 ; IC1.6 3882.38,2221.2 3948.8,2221.2 v1(3950,2220)
  Bottom Layer w15: v1(3320,2380) 3320,2389.47 3297.5,2411.97 3297.5,2477.6 3340.35,2520.45 3470.45,2520.45 v1(3520,2570) ; v1(3610,2990) 3705.15,2990 3776.94,2918.21 3776.94,2726.94 3730,2680 3730,2669.9 3630.1,2570 v1(3520,2570) ; v1(3950,2220) 3910,2260 3910,2421.21 3918.79,2430 4030,2430 4172.5,2572.5 4172.5,2617.6 4147.6,2642.5 4061.79,2642.5 3904.64,2485.36 3604.64,2485.36 v1(3520,2570)
+5: C1.1 C2.1 C3.1 C4.1 C13.1 C18.1 D1.3 D2.3 IC1.4 IC2.5 IC3.3 IC3.10 IC4.4 IC10.1 R19.1 R21.1 R22.1 | length 9429
  Top Layer w15: IC10.1 1227.99,3108.39 1254.61,3135 1541.57,3135 1565,3111.57 1565,3043.33 1422.97,2901.3 1422.97,2833.07 1433.22,2822.81 1506.34,2822.81 1508.94,2820.22 1626.78,2820.22 1762.45,2955.89 1762.45,3121.36 1898.12,3257.03 2954.19,3257.03 2980,3231.21 2980,3026.91 2924.78,2971.7 2924.78,2937.19 R22.1 2907.6,2920 v1(2850,2920) ; R19.1 2329.84,1817.4 2342.03,1829.59 2342.03,1884.33 2880.78,2423.09 2937.11,2423.09 3021.51,2507.5 3077.85,2507.5 3127.85,2557.5 3219.05,2648.69 3281.73,2711.38 3282.05,2711.38 3326.71,2666.71 3438.43,2555 IC4.4 3391.91,2422.4 3364.76,2395.25 3364.76,2364.65 3337.6,2337.5 3298.03,2337.5 3283.92,2351.61 IC2.5 3229.82,2350.26 3218.01,2350.26 3180.26,2312.5 3116.15,2312.5 3106.15,2302.5 3042.04,2302.5 3002.5,2342.04 3002.5,2378.84 2970.65,2410.69 2968.68,2410.69 D2.3 ; v1(2840,2830) R21.1 2915,2820.16 2952.19,2782.97 3268.71,2782.97 3277.5,2774.19 3277.5,2724.39 C13.1@3282.05,2719.84 ; v1(3040,2250) 3040,2304.54 ; C13.1@3282.05,2711.69 C13.1@3282.05,2719.84 ; v1(3350,2900) 3418.82,2900 IC3.3 ; IC3.10 C13.1@3282.05,2719.84 ; IC1.4 3939.51,2147.6 4234.31,1852.8 4234.31,1819.93 4220.07,1805.69 4114.31,1805.69 4110,1810 D1.3 4110,1640 4260,1490 4260,1309.57 C1.1 C2.1 C3.1 C4.1 4540,1304.57 4540,1441.21 4548.79,1450 4686.21,1450 4695,1441.21 C18.1
  Bottom Layer w15: v1(2840,2830) 2845,2835 2845,2915 v1(2850,2920) ; v1(3040,2250) 3310,2250 3360,2300 3654.64,2300 3680,2274.64 3680,2180 3760,2100 3924.03,2100 3936.91,2112.88 3936.91,2136.81 v1(3943.61,2143.5) ; v1(3330,2670) 3330,2672.18 3362.5,2704.68 3362.5,2820.21 3350,2832.71 v1(3350,2900)
GND: C1.2 C2.2 C3.2 C4.2 C5.2 C6.2 C7.2 C8.2 C9.2 C10.2 C11.2 C12.1 C14.2 C15.2 C16.2 C17.2 C18.2 IC1.1 IC1.2 IC2.1 IC2.4 IC2.8 IC3.1 IC3.2 IC3.4 IC3.5 IC3.8 IC3.9 IC3.11 IC3.13 IC4.1 IC4.2 IC5.4 IC5.5 IC6.4 IC7.4 IC8.4 IC9.2 IC10.4 K3.6 K3.7 K4.7 K5.1 K6.4 K6.Shell K7.3 K8.1 K8.7 LED3.1 LED4.1 R2.2 R4.2 R15.2 R20.2 R23.1 S1.4 S2.4 S3.4 S4.4 | length 28708.9
  Top Layer w15: C14.2 1181.73,2800 1148.79,2800 1140,2808.79 ; IC10.4 1182.72,3031.61 1140,2988.9 1140,2808.79 ; S4.4 1280.9,2710 ; S2.4 1510,1360.63 1510,1258.79 1518.79,1250 v1(1810,1250) 1967.09,1250 2208.03,1490.94 LED3.1 2319.05,1490.94 LED4.1 ; R15.2 R15.2@1599.84,2782.6 ; K8.1 K8.1@1936.51,2866.51 ; K4.7 2167.6,3097.6 K8.1@1936.51,2866.51 ; v1(2640,2860) 2702.45,2797.55 2702.45,2777.34 2744.79,2735 2800,2735 ; K3.6 K3.7 2899.63,1187.97 3669.19,1187.97 3690,1208.79 3690,1340 3670,1360 3362.95,1360 3240,1482.95 3240,1641.21 3226.08,1655.14 3118.95,1655.14 3022.04,1752.04 2962.04,1752.04 v1(2960,1750) IC6.4 ; R23.1 2800,2735 ; v1(3010,2550) 2891.56,2550 ; IC2.4 3127.46,2350.26 3115.65,2350.26 3092.89,2327.5 3052.4,2327.5 3027.5,2352.4 3027.5,2447.6 3052.4,2472.5 3099.34,2472.5 3101.84,2470 3148.79,2470 ; IC2.1 3130,2429.57 3130,2440 3140,2450 3140,2461.21 3148.79,2470 ; v1(3150,2510) 3148.79,2508.79 3148.79,2470 ; IC2.8 3231.18,2461.21 3222.39,2470 3148.79,2470 ; C11.2 3271.28,2047.5 v1(3320,2047.5) ; v1(3290.05,2870.05) 3290.1,2870 3319.9,2870 3332.4,2857.5 3367.6,2857.5 3383.49,2873.39 3440.12,2873.39 3440.89,2872.62 3455.63,2872.62 3465.89,2882.87 3465.89,2915.08 3455.63,2925.33 3440.89,2925.33 3415.89,2950.33 v1@3305.76,2950.33 ; v1(3296.39,2959.71) v1@3305.76,2950.33 ; 3362.5,2857.5 3372.2,2847.8 IC3.5 ; v1(3370,1840) 3372.6,1837.4 3451.14,1837.4 IC5.4 ; IC5.4@3414.01,1839.1 3386.83,1866.28 3386.83,1997.96 3387.5,1998.62 3387.5,2082.16 3371.4,2098.26 3371.4,2250.79 3406.65,2286.04 3638.35,2286.04 3739.4,2185 IC1.2 IC1.1 3767.6,2222.4 v1(3730,2260) ; C15.2 3308.79,1435 3300,1443.79 3300,1541.21 3308.79,1550 IC7.4 3467.52,1550 3538.89,1621.37 3538.89,1686.84 3618.52,1766.47 ; IC3.9 3420,2745.59 IC3.8@3420,2770.26 ; IC3.8 3420,2770.87 IC3.8@3420,2770.26 ; C12.1 C12.1@3531.89,3058.46 ; IC4.1 IC4.2 3755.87,2385 3760.87,2390 IC9.2 3773.05,2386.67 3790.91,2386.67 3812.13,2365.46 3812.13,2345.49 3837.61,2320 3952.6,2320 4002.5,2369.9 4002.5,2466.87 3874.13,2595.24 3874.13,2624.76 3894.19,2644.82 3908.96,2644.82 3932.25,2668.12 4076.21,2668.12 ; IC5.5 3624.32,1835 3618.52,1829.2 3618.52,1766.47 ; IC3.11 3650,2720 3608.79,2720 3600,2728.79 3600,2761.21 3610.58,2771.79 3611.35,2771.02 IC3.13 3685.1,2771.02 3685.69,2771.61 3761.03,2771.61 3778.52,2789.1 3778.52,2817.26 3816.69,2855.43 3832.44,2855.43 3845.61,2868.6 3845.61,2876.48 3930,2960.87 ; C10.2 C10.2@3660,3058.46 ; v1(3707.5,1750) 3634.99,1750 3618.52,1766.47 ; C6.2 C7.2 C8.2 C9.2 C5.2 4151.16,1236.95 4268.84,1236.95 C1.2 C2.2 C3.2 C4.2 4689.92,1235.79 C18.2 4695,1195 4710,1180 v1(4810,1180) ; IC8.4 4085,2659.33 4076.21,2668.12 ; K6.4 4581.97,2250 R20.2 4460,2240.16 4447.81,2227.97 4444.84,2227.97 4326.91,2110.04 4326.91,2070.39 4316.66,2060.14 4278.54,2060.14 4268.29,2070.39 4268.29,2337.6 4389.64,2458.96 4417.26,2458.96 4455.43,2497.13 R2.2 4455.43,2512.87 4330,2638.31 4330,2790 4268.96,2851.04 4111.04,2851.04 4076.21,2816.21 ; 1140,2808.79 1140,2720 1150,2710 1280.9,2710 ; 1280.9,2710 1380,2710 1400,2690 1400,2473.06 1408.79,2464.27 1474.27,2464.27 1560,2550 2891.56,2550 ; R15.2@1599.85,2782.61 1697.25,2782.61 1869.64,2955 1875.1,2955 2014.63,3094.52 2014.63,3173.53 2073.12,3232.03 2262.08,3232.03 2314.63,3179.48 2314.63,3140.52 2253.16,3079.05 2182.55,3079.05 1970,2866.51 K8.1@1936.51,2866.51 ; R15.2@1599.84,2782.6 1672.44,2710 2921.56,2710 2949.78,2681.78 2949.78,2608.22 2891.56,2550 ; 2800,2735 2800,2799.36 2797.5,2801.86 2797.5,2866.21 2808.79,2877.5 2939.49,2877.5 2950.22,2888.22 ; 2950.22,2888.22 2950.22,2961.78 3010.94,3022.5 ; 2950.22,2888.22 2960.47,2877.97 3014.34,2877.97 3032.09,2895.73 3032.09,2897.66 3056.46,2922.03 3058.39,2922.03 3058.92,2922.55 3223.75,2922.55 3251.53,2950.33 v1@3305.76,2950.33 ; 3010.94,3022.5 3035.94,3047.5 3242.04,3047.5 3289.4,3094.86 3495.49,3094.86 C12.1@3531.89,3058.46 ; 3010.94,3022.5 3252.39,3022.5 3257.1,3027.21 3419.9,3027.21 3445.19,3001.91 3465.59,3001.91 3525,2942.51 3525,2905.03 3536.7,2893.33 3536.7,2816.7 3490.26,2770.26 IC3.8@3420,2770.26 ; C12.1@3531.89,3058.46 3568.29,3094.86 3623.6,3094.86 C10.2@3660,3058.46 ; C10.2@3660,3058.46 3671.4,3069.86 3671.4,3081.4 3764.07,3174.07 3829.94,3174.07 C16.2 3864.13,3180 3921.21,3180 3930,3171.21 3930,2960.87 ; 3930,2960.87 3930,2935.43 4050,2815.43 4075.43,2815.43 4076.21,2816.21 ; 4076.21,2668.12 4076.21,2816.21
  Bottom Layer w15: S1.4 1221.42,1248.58 1250,1220 1500,1220 ; S4.4 1380,2610.9 1380,2300 1400,2280 1400,2002.28 K7.3 1402.28,1808.79 1411.07,1800 1990,1800 2030,1760 2030,1660.34 2040,1650.34 2040,1290 1970,1220 1500,1220 ; S2.4 1516.42,1355.12 1490,1328.71 1490,1230 1500,1220 ; S3.4 1808.21,1365.26 1808.21,1251.79 v1(1810,1250) ; K8.1 1945.44,2834.56 1965.44,2834.56 2040,2760 2430,2760 2527.5,2857.5 2637.5,2857.5 v1(2640,2860) ; v1(2960,1750) 2930,1750 2930,2111.21 2938.79,2120 2959.9,2120 2982.4,2142.5 3107.6,2142.5 3132.5,2117.6 3132.5,2037.5 3170,2000 3270,2000 3370,1900 v1(3370,1840) 3620,1840 3707.5,1752.5 v1(3707.5,1750) ; v1(3010,2550) 3110,2550 v1(3150,2510) ; v1(3290.05,2870.05) 3293.22,2873.22 3293.22,2956.54 v1(3296.39,2959.71) ; v1(3320,2047.5) 3322.5,2050 3700,2050 3710,2040 3710,1950.1 3707.5,1947.6 3707.5,1912.4 3710,1909.9 v1@3710,1752.5 ; v1(3670,2380) 3670,2320 v1(3730,2260) ; v1(4810,1180) 4810.43,1180.43 4810.43,1730.9 4810.87,1731.34 4810.87,2121.21 4802.08,2130 4706.38,2130 K6.4 4704.17,2134.88 4810.87,2241.57 4810.87,2248.66 4810.87,2400.35 4810,2401.21 4837.07,2428.28 4837.07,2467.07 K5.1
NetC13_2: C13.2 IC10.3 | length 2583
  Top Layer w15: v1(1140,3060) 1142.8,3057.2 IC10.3 ; v1(3150,2710) 3208.11,2710 C13.2
  Bottom Layer w15: v1(1140,3060) 1140,3181.21 1148.79,3190 1801.21,3190 1810,3181.21 1810,3044.9 1834.9,3020 2580,3020 2927.03,2672.97 3112.97,2672.97 v1(3150,2710)
NetC16_1: C16.1 IC3.19 | length 270
  Top Layer w15: IC3.19 3651.52,2925.92 3681,2925.92 3750.56,2995.48 3750.56,3001.19 3835.24,3085.87 C16.1
NetD1_1: D1.1 D2.2 IC3.16 R13.1 | length 9515.8
  Top Layer w15: v1(2830,2270) 2835.57,2270 2857.97,2292.4 R13.1 2910,2355.2 2887.6,2377.6 D2.2 ; IC3.16 3682.2,2847.8 3682.97,2847.03 3708.68,2847.03 v1(3709.44,2847.8) 3770,2908.35 v2(3770,2980) ; D1.1 4147.4,1887.4 4203.15,1831.65 4208.35,1831.65 v2(4210,1830)
  Bottom Layer w15: v1(2830,2270) 2830,2620.21 2711.42,2738.79 2578.79,2738.79 2570,2730 2570,1690 2580,1680 2930,1680 3160,1450 3160,1448.79 3168.79,1440 4560,1440 4600,1480 4600,2650 3960,3290 3588.79,3290 3580,3281.21 3580,3085.79 3567.5,3073.29 3567.5,2869.08 3588.79,2847.8 v1(3709.44,2847.8) ; v2(3770,2980) 3820,3030 4190,3030 4560,2660 4560,1830 v2(4210,1830)
NetD1_2: D1.2 IC3.14 R12.1 | length 2335
  Top Layer w15: IC3.14 3718.37,2796.61 3773.93,2852.18 3773.93,2883.32 3823.3,2932.69 3823.3,2973.3 v1(3830,2980) ; v1(3960,1970) 3957.4,1967.4 R12.1 3958.03,1889.37 D1.2
  Bottom Layer w15: v1(3830,2980) 3840,2970 4220,2970 4540,2650 4540,2458.79 4531.21,2450 4405.46,2450 4184.31,2228.85 4184.31,2194.31 v1(3960,1970)
NetD2_1: D2.1 IC3.18 R14.1 | length 1674.6
  Top Layer w15: v1(2872.5,2499.21) 2872.5,2489.74 2879.35,2482.89 2879.35,2456.71 2883.66,2452.4 D2.1 ; R14.1 v1(3650,2650) ; IC3.18 3686.54,2898.98 3686.72,2898.8 3697.94,2898.8 3712.36,2913.22 v1(3721.83,2913.22)
  Bottom Layer w15: v1(2872.5,2499.21) 2872.5,2423.01 2855,2405.51 2855,2338.79 2866.29,2327.5 3157.5,2327.5 3180,2350 3180,2440 3422.5,2682.5 3615.32,2682.5 3647.82,2650 v1(3650,2650) 3751.94,2751.94 3751.94,2873.64 3721.83,2903.75 v1(3721.83,2913.22)
NetD3_2: D3.2 K7.1 | length 593.9
  Top Layer w15: K7.1 1166.06,2049.21 1188.09,2071.24 1283.7,2071.24 1460,2247.54 D3.2
NetIC2_2: IC2.2 IC3.6 K4.10 R21.2 | length 3315.3
  Top Layer w15: v1(1852.5,3062.5) 1859.2,3069.2 1859.2,3151.6 K4.10 ; v1(2744.95,2794.95) 2750,2800 2750,2920 v1(2810,2980) ; v1(3070,2430) 3072.93,2430 3100.13,2402.79 IC2.2 ; v1(3074.59,2880.05) 3068.79,2874.25 3068.79,2838.79 3060,2830 R21.2 2997.3,2822.5 3337.6,2822.5 3337.9,2822.2 IC3.6
  Bottom Layer w15: v1(1852.5,3062.5) 1944.09,3062.5 1945.74,3060.85 2929.15,3060.85 3067.9,2922.1 3067.9,2886.75 v1(3074.59,2880.05) ; v1(2744.95,2794.95) 2912.4,2627.5 3078.71,2627.5 3087.5,2618.71 3087.5,2601.29 3078.71,2592.5 2978.79,2592.5 2967.5,2581.21 2967.5,2532.4 3069.9,2430 v1(3070,2430) ; v1(2810,2980) 2965.18,2980 v1@3065.12,2880.05
NetIC2_3: IC2.3 IC3.7 K4.9 R22.2 | length 3404.2
  Top Layer w15: v1(1963.35,3103.35) 1965.47,3105.47 1965.47,3157.88 K4.9 ; R22.2 2987.4,2934.84 2999.59,2947.03 3048.04,2947.03 3051.34,2950.33 3216.17,2950.33 3242.36,2976.52 3253.89,2976.52 3253.89,2977.31 3278.79,3002.21 3314,3002.21 3338.89,2977.31 3338.89,2976.52 3455.63,2976.52 3465.89,2966.26 3465.89,2950.44 3490.89,2925.44 3490.89,2846.44 3490,2845.55 3490,2805.36 3481.26,2796.61 IC3.7 3384.9,2796.61 3384.13,2795.85 3375.32,2795.85 3366.17,2786.7 3326.7,2786.7 v1(3320,2780) ; v1(3070,2370) 3079.47,2370 3086.67,2377.2 IC2.3
  Bottom Layer w15: v1(1963.35,3103.35) 1970,3110 2915.36,3110 3117.09,2908.26 3117.09,2862.45 3064.91,2810.26 3049.69,2810.26 2997.5,2758.08 2997.5,2722.87 3022.4,2697.97 3057.6,2697.97 3087.5,2727.87 3087.5,2737.6 3129.9,2780 v1(3320,2780) 3320,2777.14 3287.5,2744.64 3287.5,2582.86 3172.14,2467.5 3121.29,2467.5 3112.5,2458.71 3112.5,2412.4 3070.1,2370 v1(3070,2370)
NetIC2_7: IC2.7 IC8.3 | length 1106.7
  Top Layer w15: IC2.7 3272.79,2402.79 3296.41,2426.41 3306.41,2426.41 v1(3340,2460) ; v1(4127.5,2592.4) 4132.6,2587.3 4132.6,2472.4 IC8.3
  Bottom Layer w15: v1(3340,2460) 3914.64,2460 4054.64,2600 4080.43,2600 4081.33,2599.09 4120.8,2599.09 v1(4127.5,2592.4)
NetIC3_12: IC3.12 R4.1 R5.2 | length 293.1
  Top Layer w15: IC3.12 3685.1,2745.43 3685.87,2744.67 3776.79,2744.67 3816.69,2784.57 R4.1 3920,2784.57 R5.2
NetIC5_1: IC5.1 R6.1 | length 261.2
  Top Layer w15: R6.1 3409.57,2095.45 3425.61,2079.41 3425.61,1990.8 3431.41,1985 IC5.1
NetIC5_2: IC5.2 IC6.2 IC7.2 IC8.6 IC9.3 K5.2 K6.1 R1.1 | length 5358.3
  Top Layer w15: IC6.2 2860,1877.01 2934.04,1951.04 3293.35,1951.04 3303.6,1940.79 3303.6,1869.06 3302.5,1867.96 3302.5,1812.04 3342.04,1772.5 3506.07,1772.5 3545.26,1811.69 ; v1(3350,1650) IC7.2 3466.7,1650 3545.26,1728.56 3545.26,1811.69 ; IC5.2 3488.98,1935 3545.26,1878.72 3545.26,1811.69 ; IC9.3 3778.58,2352.6 3781.91,2349.27 3781.91,2340.35 3834.76,2287.5 v1@4017.5,2287.5 ; v1(4018.75,2288.75) v1@4017.5,2287.5 ; IC8.6 IC8.6@4135,2241.66 ; K5.2 4550,2380 R1.1 4455.87,2372.13 4469.04,2358.96 4537.29,2358.96 4749.63,2146.62 4749.63,1897.66 K6.1 4621.38,1935 4222.82,1935 4135,2022.82 IC8.6@4135,2241.66 ; v1@4017.5,2287.5 4017.5,2280.53 4043.82,2254.21 4043.82,2238.6 4072.04,2210.38 4103.72,2210.38 IC8.6@4135,2241.66
  Bottom Layer w15: v1(3350,1650) 3350,1640.53 3370.53,1620 3711.41,1620 3730.76,1600.65 3781.21,1600.65 3790,1609.44 3790,1667.6 3777.5,1680.1 3777.5,1806.35 3792.5,1821.35 3792.5,2027.5 3810,2045 3949.64,2045 4036.22,2131.58 4036.22,2188.2 4017.5,2206.92 4017.5,2287.5 v1(4018.75,2288.75)
NetIC5_3: IC5.3 IC6.3 IC7.3 R1.2 R20.1 T1.2 | length 6331.2
  Top Layer w15: IC6.3 2910,1877.01 2939.31,1906.32 3083.68,1906.32 v1(3090,1900) ; v1(3090,2100) 3335,2100 ; v1(3319.13,1598.55) 3320,1599.42 3320,1600 IC7.3 ; IC5.3 3488.98,1885 3520.26,1853.72 3520.26,1822.04 3501.93,1803.72 3405.15,1803.72 3398.93,1797.5 3352.4,1797.5 3327.5,1822.4 3327.5,1857.6 3328.6,1858.71 3328.6,1975.08 3362.5,2008.98 3362.5,2067.6 3346.4,2083.71 3346.4,2088.6 3335,2100 ; T1.2 4297.6,2152.56 ; R1.2 4385.1,2379.9 4385.1,2250.1 R20.1 4385.2,2240.16 4297.6,2152.56 ; 3335,2100 3335,2249.75 3396.29,2311.04 3775.86,2311.04 3824.4,2262.5 3979.83,2262.5 4100,2142.33 4100,2022.47 4212.47,1910 4580,1910 4690,1800 4716.25,1800 4774.63,1858.38 4774.63,2156.98 4577.02,2354.59 4577.02,2367.02 4857.07,2647.07 4884.85,2647.07 4912.93,2675.15 4912.93,2714.85 4884.85,2742.93 4845.15,2742.93 4817.07,2714.85 4817.07,2685 4566.02,2433.96 4400,2433.96 4369.46,2403.42 4297.6,2331.55 4297.6,2152.56
  Bottom Layer w15: v1(3090,1900) 3090,1988.79 ; v1(3090,2100) 3090,1988.79 ; v1(3319.13,1598.55) 3320,1599.42 3320,1619.9 3307.5,1632.4 3307.5,1667.6 3320,1680.1 3320,1914.64 3254.64,1980 3098.79,1980 3090,1988.79
NetIC5_6: IC5.6 R12.2 | length 238.2
  Top Layer w15: IC5.6 3877.6,1885 R12.2
NetIC5_8: IC5.8 R7.1 | length 284.7
  Top Layer w15: R7.1 3564.57,2031.46 3611.02,1985 IC5.8
NetIC6_1: IC6.1 R8.1 | length 174
  Top Layer w15: R8.1 2806.02,1834.13 2810,1838.12 IC6.1
NetIC6_6: IC6.6 R13.2 | length 183.1
  Top Layer w15: IC6.6 R13.2
NetIC6_8: IC6.8 R9.1 | length 183.6
  Top Layer w15: R9.1 2806.02,2055.43 2810,2051.45 IC6.8
NetIC7_1: IC7.1 R10.1 | length 241.1
  Top Layer w15: R10.1 3195.2,1700 IC7.1
NetIC7_6: IC7.6 R14.2 | length 2525.2
  Top Layer w15: IC7.6 3658.83,1600 3676.48,1582.35 3688.96,1582.35 v1(3695.65,1575.65) ; R14.2@3640.16,2530.2 R14.2 3650.1,2530.1 3709.9,2530.1 v1(3710,2530) ; v1(3870,1570) v1(3980,1570)
  Bottom Layer w15: v1(3695.65,1575.65) 3698.48,1572.83 3867.17,1572.83 v1(3870,1570) ; v1(3710,2530) 3890,2530 4050,2690 4135.46,2690 4197.5,2627.96 4197.5,2588.79 4206.29,2580 4250,2580 4352.5,2477.5 4352.5,2432.4 4261.3,2341.2 4241.2,2341.2 4150,2250 4150,2210 3960,2020 3840,2020 3830,2010 3830,1760 3973.3,1616.7 3973.3,1576.7 v1(3980,1570)
NetIC7_8: IC7.8 R11.1 | length 1383.1
  Top Layer w15: v1(3260,1820) 3262.72,1822.72 3262.72,1902.28 R11.1 ; IC7.8 v1(3820,1700)
  Bottom Layer w15: v1(3260,1820) 3260,1597.58 3324.42,1533.15 3713.26,1533.15 3714.11,1534.01 3797.6,1534.01 3804.11,1527.5 3887.6,1527.5 3912.5,1552.4 3912.5,1607.5 v1(3820,1700)
NetIC8_1: IC8.1 IC8.5 R3.2 | length 606.1
  Top Layer w15: IC8.5 4085,2312.52 4146.02,2373.54 4173.98,2373.54 4235,2434.57 IC8.1 4235,2606.92 4240,2611.92 4240,2717.56 4185.43,2772.13 R3.2
NetIC8_2: IC8.2 R2.1 R3.1 | length 853.6
  Top Layer w15: IC8.2 4185,2665 4114.57,2735.43 4114.57,2787.87 4152.74,2826.04 4213.35,2826.04 4292.37,2747.02 4292.37,2605.07 4384.57,2512.87 R2.1
NetIC8_7: IC8.7 T1.1 | length 699.5
  Top Layer w15: IC8.7 4185,2008.18 4233.18,1960 4411.21,1960 4420,1968.79 4420,2089.52 4411.21,2098.31 T1.1
NetIC9_1: IC9.1 IC9.4 R5.1 | length 625.3
  Top Layer w15: IC9.1 3778.58,2427.4 3781.91,2430.73 3781.91,2439.59 3800,2457.68 3800,2520 3829.07,2549.07 3829.07,2659.57 3878.77,2709.26 3932.57,2709.26 3995.43,2772.13 R5.1 ; 3800,2457.74 3800.06,2457.68 3812.43,2457.68 3823.09,2447.01 3823.09,2409.33 3848.09,2384.33 3848.09,2355.92 3851.42,2352.6 IC9.4
NetK1_3: K1.3 S1.1 | length 4448.1
  Bottom Layer w15: S1.1 1398.58,1681.21 1389.8,1690 1100,1690 1055.81,1734.19 1055.81,3013.38 1047.5,3021.69 1047.5,3098.31 1055.81,3106.62 1055.81,3255.81 1080,3280 3418.81,3280 3427.6,3271.21 K1.3
NetK1_4: K1.4 S2.1 | length 4541.9
  Bottom Layer w15: S2.1 1693.58,1711.21 1684.8,1720 1125,1720 1080.81,1764.19 1080.81,3023.73 1072.5,3032.04 1072.5,3087.96 1080.81,3096.27 1080.81,3236.66 1093.79,3249.64 3320.36,3249.64 3330,3240 3330,3162.4 K1.4
NetK1_5: K1.5 S3.1 | length 4622.4